# Altium PCB ScreenRGB.PcbDoc
Units mil, origin at the board's own origin, x right, y up, seen from the top; angles counter-clockwise.
Board outline 6000 x 4000 mil, 2 copper layers (Top Layer, Bottom Layer); 256 components, 258 nets, 1024 pads, 0 vias.
Unrouted connection lines stored in the file: 765.
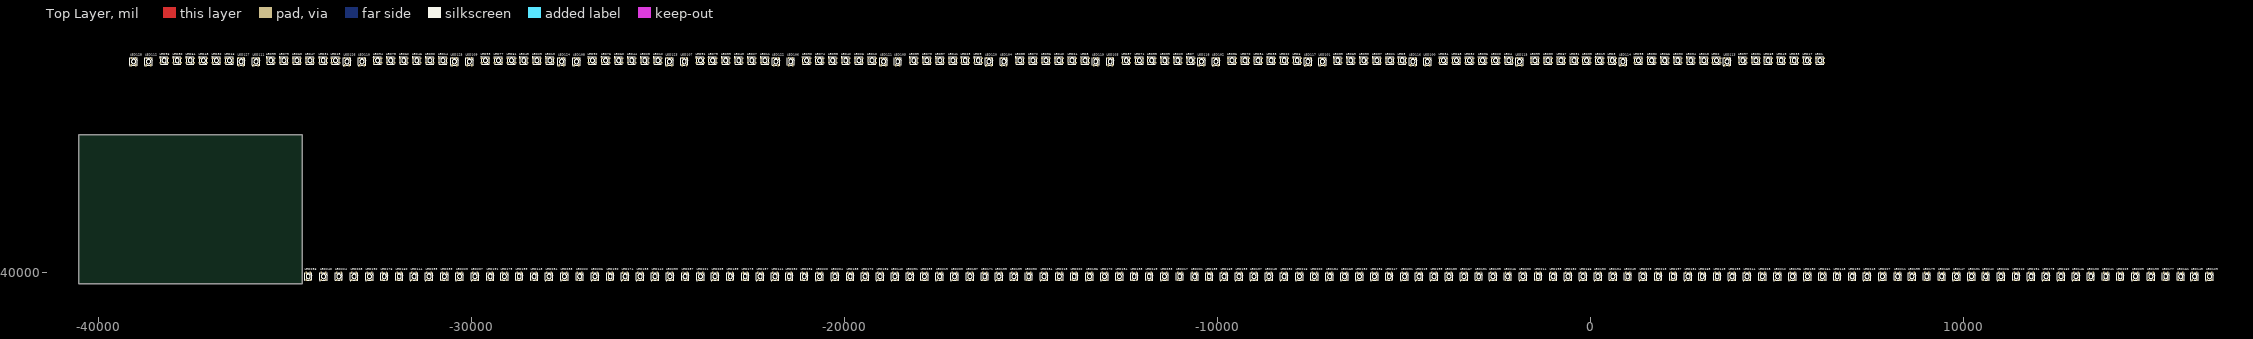
[diagram p0: Top Layer view]
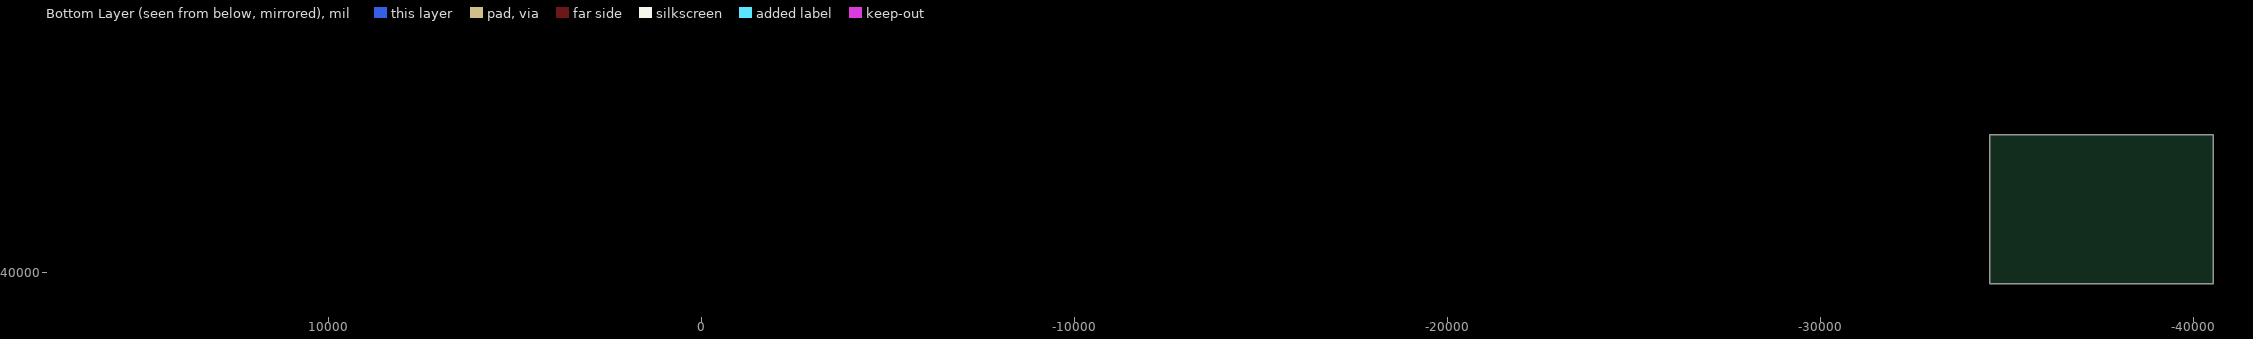
[diagram p1: Bottom Layer view, seen from below]

## Layer stack, top to bottom
Top Solder: solder mask 0.4, Solder Resist, Dk 3.5
Top Layer: signal copper 1.4
Dielectric 1: dielectric 12.6, FR-4, Dk 4.8
Bottom Layer: signal copper 1.4
Bottom Solder: solder mask 0.4, Solder Resist, Dk 3.5

## Board outline
-40540,-40310 -34540,-40310 -34540,-36310 -40540,-36310

## Design rules (kind name [scope] priority, off if disabled: settings)
Clearance [All] p1: gap=10
PolygonConnect [All] p1: connectstyle=Relief reliefconductorwidth=10 reliefentries=4 polygonreliefangle="90 Angle" airgapwidth=10
RoutingVias [All] p1: holewidth=28 width=50 viastyle="Through Hole" minholewidth=28 minwidth=50 maxholewidth=28 maxwidth=50
SolderMaskExpansion [All] p1: expansion=4
Width [All] p1: maxlimit=10 minlimit=10 preferedwidth=10
30 further rules are at their usual default settings.

## Components (designator, comment, footprint, x,y, rotation, side; value= is the part's Value field where it differs from the comment)
LED1 "RGB_WS2812C" LED_5050-SMD_4P-WS2812 6160.95,-34316.57 r0 top
LED2 "RGB_WS2812C" LED_5050-SMD_4P-WS2812 3385.95,-34316.57 r0 top
LED3 "RGB_WS2812C" LED_5050-SMD_4P-WS2812 590.95,-34316.57 r0 top
LED4 "RGB_WS2812C" LED_5050-SMD_4P-WS2812 -2184.05,-34316.57 r0 top
LED5 "RGB_WS2812C" LED_5050-SMD_4P-WS2812 -5044.05,-34316.57 r0 top
LED6 "RGB_WS2812C" LED_5050-SMD_4P-WS2812 -7859.05,-34316.57 r0 top
LED7 "RGB_WS2812C" LED_5050-SMD_4P-WS2812 -10714.05,-34316.57 r0 top
LED8 "RGB_WS2812C" LED_5050-SMD_4P-WS2812 -13549.05,-34316.57 r0 top
LED9 "RGB_WS2812C" LED_5050-SMD_4P-WS2812 -16414.05,-34316.57 r0 top
LED10 "RGB_WS2812C" LED_5050-SMD_4P-WS2812 -19264.05,-34316.57 r0 top
LED11 "RGB_WS2812C" LED_5050-SMD_4P-WS2812 -22139.05,-34316.57 r0 top
LED12 "RGB_WS2812C" LED_5050-SMD_4P-WS2812 -25009.05,-34316.57 r0 top
LED13 "RGB_WS2812C" LED_5050-SMD_4P-WS2812 -27904.05,-34316.57 r0 top
LED14 "RGB_WS2812C" LED_5050-SMD_4P-WS2812 -30774.05,-34316.57 r0 top
LED15 "RGB_WS2812C" LED_5050-SMD_4P-WS2812 -33654.05,-34316.57 r0 top
LED16 "RGB_WS2812C" LED_5050-SMD_4P-WS2812 -36499.05,-34316.57 r0 top
LED17 "RGB_WS2812C" LED_5050-SMD_4P-WS2812 5820.95,-34316.57 r0 top
LED18 "RGB_WS2812C" LED_5050-SMD_4P-WS2812 3045.95,-34316.57 r0 top
LED19 "RGB_WS2812C" LED_5050-SMD_4P-WS2812 250.95,-34316.57 r0 top
LED20 "RGB_WS2812C" LED_5050-SMD_4P-WS2812 -2539.05,-34316.57 r0 top
LED21 "RGB_WS2812C" LED_5050-SMD_4P-WS2812 -5374.05,-34316.57 r0 top
LED22 "RGB_WS2812C" LED_5050-SMD_4P-WS2812 -8209.05,-34316.57 r0 top
LED23 "RGB_WS2812C" LED_5050-SMD_4P-WS2812 -11064.05,-34316.57 r0 top
LED24 "RGB_WS2812C" LED_5050-SMD_4P-WS2812 -13899.05,-34316.57 r0 top
LED25 "RGB_WS2812C" LED_5050-SMD_4P-WS2812 -16764.05,-34316.57 r0 top
LED26 "RGB_WS2812C" LED_5050-SMD_4P-WS2812 -19614.05,-34316.57 r0 top
LED27 "RGB_WS2812C" LED_5050-SMD_4P-WS2812 -22489.05,-34316.57 r0 top
LED28 "RGB_WS2812C" LED_5050-SMD_4P-WS2812 -25359.05,-34316.57 r0 top
LED29 "RGB_WS2812C" LED_5050-SMD_4P-WS2812 -28254.05,-34316.57 r0 top
LED30 "RGB_WS2812C" LED_5050-SMD_4P-WS2812 -31124.05,-34316.57 r0 top
LED31 "RGB_WS2812C" LED_5050-SMD_4P-WS2812 -33984.05,-34316.57 r0 top
LED32 "RGB_WS2812C" LED_5050-SMD_4P-WS2812 -36849.05,-34316.57 r0 top
LED33 "RGB_WS2812C" LED_5050-SMD_4P-WS2812 5470.95,-34316.57 r0 top
LED34 "RGB_WS2812C" LED_5050-SMD_4P-WS2812 2695.95,-34316.57 r0 top
LED35 "RGB_WS2812C" LED_5050-SMD_4P-WS2812 -99.05,-34316.57 r0 top
LED36 "RGB_WS2812C" LED_5050-SMD_4P-WS2812 -2889.05,-34316.57 r0 top
LED37 "RGB_WS2812C" LED_5050-SMD_4P-WS2812 -5724.05,-34316.57 r0 top
LED38 "RGB_WS2812C" LED_5050-SMD_4P-WS2812 -8559.05,-34316.57 r0 top
LED39 "RGB_WS2812C" LED_5050-SMD_4P-WS2812 -11414.05,-34316.57 r0 top
LED40 "RGB_WS2812C" LED_5050-SMD_4P-WS2812 -14249.05,-34316.57 r0 top
LED41 "RGB_WS2812C" LED_5050-SMD_4P-WS2812 -17094.05,-34316.57 r0 top
LED42 "RGB_WS2812C" LED_5050-SMD_4P-WS2812 -19969.05,-34316.57 r0 top
LED43 "RGB_WS2812C" LED_5050-SMD_4P-WS2812 -22839.05,-34316.57 r0 top
LED44 "RGB_WS2812C" LED_5050-SMD_4P-WS2812 -25709.05,-34316.57 r0 top
LED45 "RGB_WS2812C" LED_5050-SMD_4P-WS2812 -28604.05,-34316.57 r0 top
LED46 "RGB_WS2812C" LED_5050-SMD_4P-WS2812 -31474.05,-34316.57 r0 top
LED47 "RGB_WS2812C" LED_5050-SMD_4P-WS2812 -34339.05,-34316.57 r0 top
LED48 "RGB_WS2812C" LED_5050-SMD_4P-WS2812 -37199.05,-34316.57 r0 top
LED49 "RGB_WS2812C" LED_5050-SMD_4P-WS2812 5120.95,-34316.57 r0 top
LED50 "RGB_WS2812C" LED_5050-SMD_4P-WS2812 2345.95,-34316.57 r0 top
LED51 "RGB_WS2812C" LED_5050-SMD_4P-WS2812 -434.05,-34316.57 r0 top
LED52 "RGB_WS2812C" LED_5050-SMD_4P-WS2812 -3239.05,-34316.57 r0 top
LED53 "RGB_WS2812C" LED_5050-SMD_4P-WS2812 -6074.05,-34316.57 r0 top
LED54 "RGB_WS2812C" LED_5050-SMD_4P-WS2812 -8909.05,-34316.57 r0 top
LED55 "RGB_WS2812C" LED_5050-SMD_4P-WS2812 -11764.05,-34316.57 r0 top
LED56 "RGB_WS2812C" LED_5050-SMD_4P-WS2812 -14599.05,-34316.57 r0 top
LED57 "RGB_WS2812C" LED_5050-SMD_4P-WS2812 -17444.05,-34316.57 r0 top
LED58 "RGB_WS2812C" LED_5050-SMD_4P-WS2812 -20319.05,-34316.57 r0 top
LED59 "RGB_WS2812C" LED_5050-SMD_4P-WS2812 -23189.05,-34316.57 r0 top
LED60 "RGB_WS2812C" LED_5050-SMD_4P-WS2812 -26059.05,-34316.57 r0 top
LED61 "RGB_WS2812C" LED_5050-SMD_4P-WS2812 -28934.05,-34316.57 r0 top
LED62 "RGB_WS2812C" LED_5050-SMD_4P-WS2812 -31824.05,-34316.57 r0 top
LED63 "RGB_WS2812C" LED_5050-SMD_4P-WS2812 -34689.05,-34316.57 r0 top
LED64 "RGB_WS2812C" LED_5050-SMD_4P-WS2812 -37549.05,-34316.57 r0 top
LED65 "RGB_WS2812C" LED_5050-SMD_4P-WS2812 4770.95,-34316.57 r0 top
LED66 "RGB_WS2812C" LED_5050-SMD_4P-WS2812 1995.95,-34316.57 r0 top
LED67 "RGB_WS2812C" LED_5050-SMD_4P-WS2812 -784.05,-34316.57 r0 top
LED68 "RGB_WS2812C" LED_5050-SMD_4P-WS2812 -3589.05,-34316.57 r0 top
LED69 "RGB_WS2812C" LED_5050-SMD_4P-WS2812 -6424.05,-34316.57 r0 top
LED70 "RGB_WS2812C" LED_5050-SMD_4P-WS2812 -9259.05,-34316.57 r0 top
LED71 "RGB_WS2812C" LED_5050-SMD_4P-WS2812 -12094.05,-34316.57 r0 top
LED72 "RGB_WS2812C" LED_5050-SMD_4P-WS2812 -14949.05,-34316.57 r0 top
LED73 "RGB_WS2812C" LED_5050-SMD_4P-WS2812 -17794.05,-34316.57 r0 top
LED74 "RGB_WS2812C" LED_5050-SMD_4P-WS2812 -20669.05,-34316.57 r0 top
LED75 "RGB_WS2812C" LED_5050-SMD_4P-WS2812 -23539.05,-34316.57 r0 top
LED76 "RGB_WS2812C" LED_5050-SMD_4P-WS2812 -26409.05,-34316.57 r0 top
LED77 "RGB_WS2812C" LED_5050-SMD_4P-WS2812 -29284.05,-34316.57 r0 top
LED78 "RGB_WS2812C" LED_5050-SMD_4P-WS2812 -32174.05,-34316.57 r0 top
LED79 "RGB_WS2812C" LED_5050-SMD_4P-WS2812 -35039.05,-34316.57 r0 top
LED80 "RGB_WS2812C" LED_5050-SMD_4P-WS2812 -37899.05,-34316.57 r0 top
LED81 "RGB_WS2812C" LED_5050-SMD_4P-WS2812 4440.95,-34316.57 r0 top
LED82 "RGB_WS2812C" LED_5050-SMD_4P-WS2812 1645.95,-34316.57 r0 top
LED83 "RGB_WS2812C" LED_5050-SMD_4P-WS2812 -1134.05,-34316.57 r0 top
LED84 "RGB_WS2812C" LED_5050-SMD_4P-WS2812 -3939.05,-34316.57 r0 top
LED85 "RGB_WS2812C" LED_5050-SMD_4P-WS2812 -6774.05,-34316.57 r0 top
LED86 "RGB_WS2812C" LED_5050-SMD_4P-WS2812 -9609.05,-34316.57 r0 top
LED87 "RGB_WS2812C" LED_5050-SMD_4P-WS2812 -12444.05,-34316.57 r0 top
LED88 "RGB_WS2812C" LED_5050-SMD_4P-WS2812 -15299.05,-34316.57 r0 top
LED89 "RGB_WS2812C" LED_5050-SMD_4P-WS2812 -18144.05,-34316.57 r0 top
LED90 "RGB_WS2812C" LED_5050-SMD_4P-WS2812 -21019.05,-34316.57 r0 top
LED91 "RGB_WS2812C" LED_5050-SMD_4P-WS2812 -23869.05,-34316.57 r0 top
LED92 "RGB_WS2812C" LED_5050-SMD_4P-WS2812 -26764.05,-34316.57 r0 top
LED93 "RGB_WS2812C" LED_5050-SMD_4P-WS2812 -29634.05,-34316.57 r0 top
LED94 "RGB_WS2812C" LED_5050-SMD_4P-WS2812 -32524.05,-34316.57 r0 top
LED95 "RGB_WS2812C" LED_5050-SMD_4P-WS2812 -35389.05,-34316.57 r0 top
LED96 "RGB_WS2812C" LED_5050-SMD_4P-WS2812 -38249.05,-34316.57 r0 top
LED97 "RGB_WS2812C" LED_5050-SMD_4P-WS2812 4090.95,-34316.57 r0 top
LED98 "RGB_WS2812C" LED_5050-SMD_4P-WS2812 1290.95,-34316.57 r0 top
LED99 "RGB_WS2812C" LED_5050-SMD_4P-WS2812 -1484.05,-34316.57 r0 top
LED100 "RGB_WS2812C" LED_5050-SMD_4P-WS2812 -4369.05,-34346.57 r90 top
LED101 "RGB_WS2812C" LED_5050-SMD_4P-WS2812 -7184.05,-34346.57 r90 top
LED102 "RGB_WS2812C" LED_5050-SMD_4P-WS2812 -10039.05,-34346.57 r90 top
LED103 "RGB_WS2812C" LED_5050-SMD_4P-WS2812 -12874.05,-34346.57 r90 top
LED104 "RGB_WS2812C" LED_5050-SMD_4P-WS2812 -15729.05,-34346.57 r90 top
LED105 "RGB_WS2812C" LED_5050-SMD_4P-WS2812 -18574.05,-34346.57 r90 top
LED106 "RGB_WS2812C" LED_5050-SMD_4P-WS2812 -21444.05,-34346.57 r90 top
LED107 "RGB_WS2812C" LED_5050-SMD_4P-WS2812 -24299.05,-34346.57 r90 top
LED108 "RGB_WS2812C" LED_5050-SMD_4P-WS2812 -27189.05,-34346.57 r90 top
LED109 "RGB_WS2812C" LED_5050-SMD_4P-WS2812 -30064.05,-34346.57 r90 top
LED110 "RGB_WS2812C" LED_5050-SMD_4P-WS2812 -32944.05,-34346.57 r90 top
LED111 "RGB_WS2812C" LED_5050-SMD_4P-WS2812 -35784.05,-34346.57 r90 top
LED112 "RGB_WS2812C" LED_5050-SMD_4P-WS2812 -38669.05,-34346.57 r90 top
LED113 "RGB_WS2812C" LED_5050-SMD_4P-WS2812 3670.95,-34346.57 r90 top
LED114 "RGB_WS2812C" LED_5050-SMD_4P-WS2812 875.95,-34346.57 r90 top
LED115 "RGB_WS2812C" LED_5050-SMD_4P-WS2812 -1899.05,-34346.57 r90 top
LED116 "RGB_WS2812C" LED_5050-SMD_4P-WS2812 -4759.05,-34346.57 r90 top
LED117 "RGB_WS2812C" LED_5050-SMD_4P-WS2812 -7574.05,-34346.57 r90 top
LED118 "RGB_WS2812C" LED_5050-SMD_4P-WS2812 -10429.05,-34346.57 r90 top
LED119 "RGB_WS2812C" LED_5050-SMD_4P-WS2812 -13264.05,-34346.57 r90 top
LED120 "RGB_WS2812C" LED_5050-SMD_4P-WS2812 -16129.05,-34346.57 r90 top
LED121 "RGB_WS2812C" LED_5050-SMD_4P-WS2812 -18954.05,-34346.57 r90 top
LED122 "RGB_WS2812C" LED_5050-SMD_4P-WS2812 -21844.05,-34346.57 r90 top
LED123 "RGB_WS2812C" LED_5050-SMD_4P-WS2812 -24699.05,-34346.57 r90 top
LED124 "RGB_WS2812C" LED_5050-SMD_4P-WS2812 -27589.05,-34346.57 r90 top
LED125 "RGB_WS2812C" LED_5050-SMD_4P-WS2812 -30464.05,-34346.57 r90 top
LED126 "RGB_WS2812C" LED_5050-SMD_4P-WS2812 -33344.05,-34346.57 r90 top
LED127 "RGB_WS2812C" LED_5050-SMD_4P-WS2812 -36184.05,-34346.57 r90 top
LED128 "RGB_WS2812C" LED_5050-SMD_4P-WS2812 -39069.05,-34346.57 r90 top
LED129 "RGB_WS2812C" LED_5050-SMD_4P-WS2812 16610,-40110 r90 top
LED130 "RGB_WS2812C" LED_5050-SMD_4P-WS2812 13425,-40110 r90 top
LED131 "RGB_WS2812C" LED_5050-SMD_4P-WS2812 10225,-40110 r90 top
LED132 "RGB_WS2812C" LED_5050-SMD_4P-WS2812 7025,-40110 r90 top
LED133 "RGB_WS2812C" LED_5050-SMD_4P-WS2812 3805,-40110 r90 top
LED134 "RGB_WS2812C" LED_5050-SMD_4P-WS2812 605,-40110 r90 top
LED135 "RGB_WS2812C" LED_5050-SMD_4P-WS2812 -2610,-40110 r90 top
LED136 "RGB_WS2812C" LED_5050-SMD_4P-WS2812 -5790,-40110 r90 top
LED137 "RGB_WS2812C" LED_5050-SMD_4P-WS2812 -9020,-40110 r90 top
LED138 "RGB_WS2812C" LED_5050-SMD_4P-WS2812 -12230,-40110 r90 top
LED139 "RGB_WS2812C" LED_5050-SMD_4P-WS2812 -15460,-40110 r90 top
LED140 "RGB_WS2812C" LED_5050-SMD_4P-WS2812 -18650,-40110 r90 top
LED141 "RGB_WS2812C" LED_5050-SMD_4P-WS2812 -21865,-40110 r90 top
LED142 "RGB_WS2812C" LED_5050-SMD_4P-WS2812 -25085,-40110 r90 top
LED143 "RGB_WS2812C" LED_5050-SMD_4P-WS2812 -28325,-40110 r90 top
LED144 "RGB_WS2812C" LED_5050-SMD_4P-WS2812 -31545,-40110 r90 top
LED145 "RGB_WS2812C" LED_5050-SMD_4P-WS2812 16210,-40110 r90 top
LED146 "RGB_WS2812C" LED_5050-SMD_4P-WS2812 13025,-40110 r90 top
LED147 "RGB_WS2812C" LED_5050-SMD_4P-WS2812 9825,-40110 r90 top
LED148 "RGB_WS2812C" LED_5050-SMD_4P-WS2812 6625,-40110 r90 top
LED149 "RGB_WS2812C" LED_5050-SMD_4P-WS2812 3405,-40110 r90 top
LED150 "RGB_WS2812C" LED_5050-SMD_4P-WS2812 205,-40110 r90 top
LED151 "RGB_WS2812C" LED_5050-SMD_4P-WS2812 -2990,-40110 r90 top
LED152 "RGB_WS2812C" LED_5050-SMD_4P-WS2812 -6190,-40110 r90 top
LED153 "RGB_WS2812C" LED_5050-SMD_4P-WS2812 -9420,-40110 r90 top
LED154 "RGB_WS2812C" LED_5050-SMD_4P-WS2812 -12630,-40110 r90 top
LED155 "RGB_WS2812C" LED_5050-SMD_4P-WS2812 -15860,-40110 r90 top
LED156 "RGB_WS2812C" LED_5050-SMD_4P-WS2812 -19050,-40110 r90 top
LED157 "RGB_WS2812C" LED_5050-SMD_4P-WS2812 -22265,-40110 r90 top
LED158 "RGB_WS2812C" LED_5050-SMD_4P-WS2812 -25485,-40110 r90 top
LED159 "RGB_WS2812C" LED_5050-SMD_4P-WS2812 -28725,-40110 r90 top
LED160 "RGB_WS2812C" LED_5050-SMD_4P-WS2812 -31945,-40110 r90 top
LED161 "RGB_WS2812C" LED_5050-SMD_4P-WS2812 15835,-40110 r90 top
LED162 "RGB_WS2812C" LED_5050-SMD_4P-WS2812 12625,-40110 r90 top
LED163 "RGB_WS2812C" LED_5050-SMD_4P-WS2812 9425,-40110 r90 top
LED164 "RGB_WS2812C" LED_5050-SMD_4P-WS2812 6225,-40110 r90 top
LED165 "RGB_WS2812C" LED_5050-SMD_4P-WS2812 3005,-40110 r90 top
LED166 "RGB_WS2812C" LED_5050-SMD_4P-WS2812 -195,-40110 r90 top
LED167 "RGB_WS2812C" LED_5050-SMD_4P-WS2812 -3390,-40110 r90 top
LED168 "RGB_WS2812C" LED_5050-SMD_4P-WS2812 -6590,-40110 r90 top
LED169 "RGB_WS2812C" LED_5050-SMD_4P-WS2812 -9820,-40110 r90 top
LED170 "RGB_WS2812C" LED_5050-SMD_4P-WS2812 -13030,-40110 r90 top
LED171 "RGB_WS2812C" LED_5050-SMD_4P-WS2812 -16240,-40110 r90 top
LED172 "RGB_WS2812C" LED_5050-SMD_4P-WS2812 -19450,-40110 r90 top
LED173 "RGB_WS2812C" LED_5050-SMD_4P-WS2812 -22665,-40110 r90 top
LED174 "RGB_WS2812C" LED_5050-SMD_4P-WS2812 -25885,-40110 r90 top
LED175 "RGB_WS2812C" LED_5050-SMD_4P-WS2812 -29125,-40110 r90 top
LED176 "RGB_WS2812C" LED_5050-SMD_4P-WS2812 -32345,-40110 r90 top
LED177 "RGB_WS2812C" LED_5050-SMD_4P-WS2812 15435,-40110 r90 top
LED178 "RGB_WS2812C" LED_5050-SMD_4P-WS2812 12225,-40110 r90 top
LED179 "RGB_WS2812C" LED_5050-SMD_4P-WS2812 9025,-40110 r90 top
LED180 "RGB_WS2812C" LED_5050-SMD_4P-WS2812 5825,-40110 r90 top
LED181 "RGB_WS2812C" LED_5050-SMD_4P-WS2812 2625,-40110 r90 top
LED182 "RGB_WS2812C" LED_5050-SMD_4P-WS2812 -595,-40110 r90 top
LED183 "RGB_WS2812C" LED_5050-SMD_4P-WS2812 -3790,-40110 r90 top
LED184 "RGB_WS2812C" LED_5050-SMD_4P-WS2812 -6990,-40110 r90 top
LED185 "RGB_WS2812C" LED_5050-SMD_4P-WS2812 -10220,-40110 r90 top
LED186 "RGB_WS2812C" LED_5050-SMD_4P-WS2812 -13430,-40110 r90 top
LED187 "RGB_WS2812C" LED_5050-SMD_4P-WS2812 -16640,-40110 r90 top
LED188 "RGB_WS2812C" LED_5050-SMD_4P-WS2812 -19850,-40110 r90 top
LED189 "RGB_WS2812C" LED_5050-SMD_4P-WS2812 -23065,-40110 r90 top
LED190 "RGB_WS2812C" LED_5050-SMD_4P-WS2812 -26285,-40110 r90 top
LED191 "RGB_WS2812C" LED_5050-SMD_4P-WS2812 -29505,-40110 r90 top
LED192 "RGB_WS2812C" LED_5050-SMD_4P-WS2812 -32745,-40110 r90 top
LED193 "RGB_WS2812C" LED_5050-SMD_4P-WS2812 15035,-40110 r90 top
LED194 "RGB_WS2812C" LED_5050-SMD_4P-WS2812 11825,-40110 r90 top
LED195 "RGB_WS2812C" LED_5050-SMD_4P-WS2812 8625,-40110 r90 top
LED196 "RGB_WS2812C" LED_5050-SMD_4P-WS2812 5425,-40110 r90 top
LED197 "RGB_WS2812C" LED_5050-SMD_4P-WS2812 2225,-40110 r90 top
LED198 "RGB_WS2812C" LED_5050-SMD_4P-WS2812 -995,-40110 r90 top
LED199 "RGB_WS2812C" LED_5050-SMD_4P-WS2812 -4190,-40110 r90 top
LED200 "RGB_WS2812C" LED_5050-SMD_4P-WS2812 -7400,-40110 r90 top
LED201 "RGB_WS2812C" LED_5050-SMD_4P-WS2812 -10610,-40110 r90 top
LED202 "RGB_WS2812C" LED_5050-SMD_4P-WS2812 -13840,-40110 r90 top
LED203 "RGB_WS2812C" LED_5050-SMD_4P-WS2812 -17050,-40110 r90 top
LED204 "RGB_WS2812C" LED_5050-SMD_4P-WS2812 -20260,-40110 r90 top
LED205 "RGB_WS2812C" LED_5050-SMD_4P-WS2812 -23475,-40110 r90 top
LED206 "RGB_WS2812C" LED_5050-SMD_4P-WS2812 -26695,-40110 r90 top
LED207 "RGB_WS2812C" LED_5050-SMD_4P-WS2812 -29915,-40110 r90 top
LED208 "RGB_WS2812C" LED_5050-SMD_4P-WS2812 -33155,-40110 r90 top
LED209 "RGB_WS2812C" LED_5050-SMD_4P-WS2812 14625,-40110 r90 top
LED210 "RGB_WS2812C" LED_5050-SMD_4P-WS2812 11425,-40110 r90 top
LED211 "RGB_WS2812C" LED_5050-SMD_4P-WS2812 8245,-40110 r90 top
LED212 "RGB_WS2812C" LED_5050-SMD_4P-WS2812 5025,-40110 r90 top
LED213 "RGB_WS2812C" LED_5050-SMD_4P-WS2812 1825,-40110 r90 top
LED214 "RGB_WS2812C" LED_5050-SMD_4P-WS2812 -1395,-40110 r90 top
LED215 "RGB_WS2812C" LED_5050-SMD_4P-WS2812 -4590,-40110 r90 top
LED216 "RGB_WS2812C" LED_5050-SMD_4P-WS2812 -7800,-40110 r90 top
LED217 "RGB_WS2812C" LED_5050-SMD_4P-WS2812 -11010,-40110 r90 top
LED218 "RGB_WS2812C" LED_5050-SMD_4P-WS2812 -14240,-40110 r90 top
LED219 "RGB_WS2812C" LED_5050-SMD_4P-WS2812 -17450,-40110 r90 top
LED220 "RGB_WS2812C" LED_5050-SMD_4P-WS2812 -20670,-40110 r90 top
LED221 "RGB_WS2812C" LED_5050-SMD_4P-WS2812 -23865,-40110 r90 top
LED222 "RGB_WS2812C" LED_5050-SMD_4P-WS2812 -27105,-40110 r90 top
LED223 "RGB_WS2812C" LED_5050-SMD_4P-WS2812 -30325,-40110 r90 top
LED224 "RGB_WS2812C" LED_5050-SMD_4P-WS2812 -33565,-40110 r90 top
LED225 "RGB_WS2812C" LED_5050-SMD_4P-WS2812 14215,-40110 r90 top
LED226 "RGB_WS2812C" LED_5050-SMD_4P-WS2812 11015,-40110 r90 top
LED227 "RGB_WS2812C" LED_5050-SMD_4P-WS2812 7835,-40110 r90 top
LED228 "RGB_WS2812C" LED_5050-SMD_4P-WS2812 4615,-40110 r90 top
LED229 "RGB_WS2812C" LED_5050-SMD_4P-WS2812 1415,-40110 r90 top
LED230 "RGB_WS2812C" LED_5050-SMD_4P-WS2812 -1805,-40110 r90 top
LED231 "RGB_WS2812C" LED_5050-SMD_4P-WS2812 -4980,-40110 r90 top
LED232 "RGB_WS2812C" LED_5050-SMD_4P-WS2812 -8210,-40110 r90 top
LED233 "RGB_WS2812C" LED_5050-SMD_4P-WS2812 -11420,-40110 r90 top
LED234 "RGB_WS2812C" LED_5050-SMD_4P-WS2812 -14650,-40110 r90 top
LED235 "RGB_WS2812C" LED_5050-SMD_4P-WS2812 -17860,-40110 r90 top
LED236 "RGB_WS2812C" LED_5050-SMD_4P-WS2812 -21080,-40110 r90 top
LED237 "RGB_WS2812C" LED_5050-SMD_4P-WS2812 -24275,-40110 r90 top
LED238 "RGB_WS2812C" LED_5050-SMD_4P-WS2812 -27515,-40110 r90 top
LED239 "RGB_WS2812C" LED_5050-SMD_4P-WS2812 -30735,-40110 r90 top
LED240 "RGB_WS2812C" LED_5050-SMD_4P-WS2812 -33975,-40110 r90 top
LED241 "RGB_WS2812C" LED_5050-SMD_4P-WS2812 13825,-40110 r90 top
LED242 "RGB_WS2812C" LED_5050-SMD_4P-WS2812 10605,-40110 r90 top
LED243 "RGB_WS2812C" LED_5050-SMD_4P-WS2812 7425,-40110 r90 top
LED244 "RGB_WS2812C" LED_5050-SMD_4P-WS2812 4205,-40110 r90 top
LED245 "RGB_WS2812C" LED_5050-SMD_4P-WS2812 1005,-40110 r90 top
LED246 "RGB_WS2812C" LED_5050-SMD_4P-WS2812 -2215,-40110 r90 top
LED247 "RGB_WS2812C" LED_5050-SMD_4P-WS2812 -5390,-40110 r90 top
LED248 "RGB_WS2812C" LED_5050-SMD_4P-WS2812 -8620,-40110 r90 top
LED249 "RGB_WS2812C" LED_5050-SMD_4P-WS2812 -11830,-40110 r90 top
LED250 "RGB_WS2812C" LED_5050-SMD_4P-WS2812 -15060,-40110 r90 top
LED251 "RGB_WS2812C" LED_5050-SMD_4P-WS2812 -18250,-40110 r90 top
LED252 "RGB_WS2812C" LED_5050-SMD_4P-WS2812 -21485,-40110 r90 top
LED253 "RGB_WS2812C" LED_5050-SMD_4P-WS2812 -24685,-40110 r90 top
LED254 "RGB_WS2812C" LED_5050-SMD_4P-WS2812 -27925,-40110 r90 top
LED255 "RGB_WS2812C" LED_5050-SMD_4P-WS2812 -31145,-40110 r90 top
LED256 "RGB_WS2812C" LED_5050-SMD_4P-WS2812 -34385,-40110 r90 top

## Footprints (in the part's own frame and the unit in brackets; to place one, negate y for a bottom-side part, rotate by r counter-clockwise, add the part's x,y. Pads: shape width x height; smd on the part's side, far side on the other; paste and mask are expansions set on the pad)
LED_5050-SMD_4P-WS2812 [mm]
  rect 1.5x1 smd: 1(-2.5,1.5) 2(-2.5,-1.5) 3(2.5,-1.5) 4(2.5,1.5)
  silkscreen extent -3,-2.5 2.5,2.5, body extent -2.65,-2.5 2.65,2.5, height 1.6

## Nets (pads, with @x,y where several pads share a name; then routed paths per layer and width w, separated by ;. In a path a pad name is that pad's centre, name@x,y a point inside that pad or via, vN(x,y) a via of type N, cw(c..) or ccw(c..) an arc to the next point about the centre after c; other vN are vias at no path point)
DIN: LED1.4
DOUT1: LED16.2 LED17.4
DOUT2: LED32.2 LED33.4
DOUT3: LED48.2 LED49.4
DOUT4: LED64.2 LED65.4
DOUT5: LED80.2 LED81.4
DOUT6: LED96.2 LED97.4
DOUT7: LED112.2 LED113.4
DOUT8: LED128.2 LED129.4
DOUT9: LED144.2 LED145.4
DOUT10: LED160.2 LED161.4
DOUT11: LED176.2 LED177.4
DOUT12: LED192.2 LED193.4
DOUT13: LED208.2 LED209.4
DOUT14: LED224.2 LED225.4
DOUT15: LED240.2 LED241.4
GND: LED1.3 LED2.3 LED3.3 LED4.3 LED5.3 LED6.3 LED7.3 LED8.3 LED9.3 LED10.3 LED11.3 LED12.3 LED13.3 LED14.3 LED15.3 LED16.3 LED17.3 LED18.3 LED19.3 LED20.3 LED21.3 LED22.3 LED23.3 LED24.3 LED25.3 LED26.3 LED27.3 LED28.3 LED29.3 LED30.3 LED31.3 LED32.3 LED33.3 LED34.3 LED35.3 LED36.3 LED37.3 LED38.3 LED39.3 LED40.3 LED41.3 LED42.3 LED43.3 LED44.3 LED45.3 LED46.3 LED47.3 LED48.3 LED49.3 LED50.3 LED51.3 LED52.3 LED53.3 LED54.3 LED55.3 LED56.3 LED57.3 LED58.3 LED59.3 LED60.3 LED61.3 LED62.3 LED63.3 LED64.3 LED65.3 LED66.3 LED67.3 LED68.3 LED69.3 LED70.3 LED71.3 LED72.3 LED73.3 LED74.3 LED75.3 LED76.3 LED77.3 LED78.3 LED79.3 LED80.3 LED81.3 LED82.3 LED83.3 LED84.3 LED85.3 LED86.3 LED87.3 LED88.3 LED89.3 LED90.3 LED91.3 LED92.3 LED93.3 LED94.3 LED95.3 LED96.3 LED97.3 LED98.3 LED99.3 LED100.3 LED101.3 LED102.3 LED103.3 LED104.3 LED105.3 LED106.3 LED107.3 LED108.3 LED109.3 LED110.3 LED111.3 LED112.3 LED113.3 LED114.3 LED115.3 LED116.3 LED117.3 LED118.3 LED119.3 LED120.3 LED121.3 LED122.3 LED123.3 LED124.3 LED125.3 LED126.3 LED127.3 LED128.3 LED129.3 LED130.3 LED131.3 LED132.3 LED133.3 LED134.3 LED135.3 LED136.3 LED137.3 LED138.3 LED139.3 LED140.3 LED141.3 LED142.3 LED143.3 LED144.3 LED145.3 LED146.3 LED147.3 LED148.3 LED149.3 LED150.3 LED151.3 LED152.3 LED153.3 LED154.3 LED155.3 LED156.3 LED157.3 LED158.3 LED159.3 LED160.3 LED161.3 LED162.3 LED163.3 LED164.3 LED165.3 LED166.3 LED167.3 LED168.3 LED169.3 LED170.3 LED171.3 LED172.3 LED173.3 LED174.3 LED175.3 LED176.3 LED177.3 LED178.3 LED179.3 LED180.3 LED181.3 LED182.3 LED183.3 LED184.3 LED185.3 LED186.3 LED187.3 LED188.3 LED189.3 LED190.3 LED191.3 LED192.3 LED193.3 LED194.3 LED195.3 LED196.3 LED197.3 LED198.3 LED199.3 LED200.3 LED201.3 LED202.3 LED203.3 LED204.3 LED205.3 LED206.3 LED207.3 LED208.3 LED209.3 LED210.3 LED211.3 LED212.3 LED213.3 LED214.3 LED215.3 LED216.3 LED217.3 LED218.3 LED219.3 LED220.3 LED221.3 LED222.3 LED223.3 LED224.3 LED225.3 LED226.3 LED227.3 LED228.3 LED229.3 LED230.3 LED231.3 LED232.3 LED233.3 LED234.3 LED235.3 LED236.3 LED237.3 LED238.3 LED239.3 LED240.3 LED241.3 LED242.3 LED243.3 LED244.3 LED245.3 LED246.3 LED247.3 LED248.3 LED249.3 LED250.3 LED251.3 LED252.3 LED253.3 LED254.3 LED255.3 LED256.3
NetLED1_2: LED1.2 LED2.4
NetLED2_2: LED2.2 LED3.4
NetLED3_2: LED3.2 LED4.4
NetLED4_2: LED4.2 LED5.4
NetLED5_2: LED5.2 LED6.4
NetLED6_2: LED6.2 LED7.4
NetLED7_2: LED7.2 LED8.4
NetLED8_2: LED8.2 LED9.4
NetLED9_2: LED9.2 LED10.4
NetLED10_2: LED10.2 LED11.4
NetLED11_2: LED11.2 LED12.4
NetLED12_2: LED12.2 LED13.4
NetLED13_2: LED13.2 LED14.4
NetLED14_2: LED14.2 LED15.4
NetLED15_2: LED15.2 LED16.4
NetLED17_2: LED17.2 LED18.4
NetLED18_2: LED18.2 LED19.4
NetLED19_2: LED19.2 LED20.4
NetLED20_2: LED20.2 LED21.4
NetLED21_2: LED21.2 LED22.4
NetLED22_2: LED22.2 LED23.4
NetLED23_2: LED23.2 LED24.4
NetLED24_2: LED24.2 LED25.4
NetLED25_2: LED25.2 LED26.4
NetLED26_2: LED26.2 LED27.4
NetLED27_2: LED27.2 LED28.4
NetLED28_2: LED28.2 LED29.4
NetLED29_2: LED29.2 LED30.4
NetLED30_2: LED30.2 LED31.4
NetLED31_2: LED31.2 LED32.4
NetLED33_2: LED33.2 LED34.4
NetLED34_2: LED34.2 LED35.4
NetLED35_2: LED35.2 LED36.4
NetLED36_2: LED36.2 LED37.4
NetLED37_2: LED37.2 LED38.4
NetLED38_2: LED38.2 LED39.4
NetLED39_2: LED39.2 LED40.4
NetLED40_2: LED40.2 LED41.4
NetLED41_2: LED41.2 LED42.4
NetLED42_2: LED42.2 LED43.4
NetLED43_2: LED43.2 LED44.4
NetLED44_2: LED44.2 LED45.4
NetLED45_2: LED45.2 LED46.4
NetLED46_2: LED46.2 LED47.4
NetLED47_2: LED47.2 LED48.4
NetLED49_2: LED49.2 LED50.4
NetLED50_2: LED50.2 LED51.4
NetLED51_2: LED51.2 LED52.4
NetLED52_2: LED52.2 LED53.4
NetLED53_2: LED53.2 LED54.4
NetLED54_2: LED54.2 LED55.4
NetLED55_2: LED55.2 LED56.4
NetLED56_2: LED56.2 LED57.4
NetLED57_2: LED57.2 LED58.4
NetLED58_2: LED58.2 LED59.4
NetLED59_2: LED59.2 LED60.4
NetLED60_2: LED60.2 LED61.4
NetLED61_2: LED61.2 LED62.4
NetLED62_2: LED62.2 LED63.4
NetLED63_2: LED63.2 LED64.4
NetLED65_2: LED65.2 LED66.4
NetLED66_2: LED66.2 LED67.4
NetLED67_2: LED67.2 LED68.4
NetLED68_2: LED68.2 LED69.4
NetLED69_2: LED69.2 LED70.4
NetLED70_2: LED70.2 LED71.4
NetLED71_2: LED71.2 LED72.4
NetLED72_2: LED72.2 LED73.4
NetLED73_2: LED73.2 LED74.4
NetLED74_2: LED74.2 LED75.4
NetLED75_2: LED75.2 LED76.4
NetLED76_2: LED76.2 LED77.4
NetLED77_2: LED77.2 LED78.4
NetLED78_2: LED78.2 LED79.4
NetLED79_2: LED79.2 LED80.4
NetLED81_2: LED81.2 LED82.4
NetLED82_2: LED82.2 LED83.4
NetLED83_2: LED83.2 LED84.4
NetLED84_2: LED84.2 LED85.4
NetLED85_2: LED85.2 LED86.4
NetLED86_2: LED86.2 LED87.4
NetLED87_2: LED87.2 LED88.4
NetLED88_2: LED88.2 LED89.4
NetLED89_2: LED89.2 LED90.4
NetLED90_2: LED90.2 LED91.4
NetLED91_2: LED91.2 LED92.4
NetLED92_2: LED92.2 LED93.4
NetLED93_2: LED93.2 LED94.4
NetLED94_2: LED94.2 LED95.4
NetLED95_2: LED95.2 LED96.4
NetLED97_2: LED97.2 LED98.4
NetLED98_2: LED98.2 LED99.4
NetLED99_2: LED99.2 LED100.4
NetLED100_2: LED100.2 LED101.4
NetLED101_2: LED101.2 LED102.4
NetLED102_2: LED102.2 LED103.4
NetLED103_2: LED103.2 LED104.4
NetLED104_2: LED104.2 LED105.4
NetLED105_2: LED105.2 LED106.4
NetLED106_2: LED106.2 LED107.4
NetLED107_2: LED107.2 LED108.4
NetLED108_2: LED108.2 LED109.4
NetLED109_2: LED109.2 LED110.4
NetLED110_2: LED110.2 LED111.4
NetLED111_2: LED111.2 LED112.4
NetLED113_2: LED113.2 LED114.4
NetLED114_2: LED114.2 LED115.4
NetLED115_2: LED115.2 LED116.4
NetLED116_2: LED116.2 LED117.4
NetLED117_2: LED117.2 LED118.4
NetLED118_2: LED118.2 LED119.4
NetLED119_2: LED119.2 LED120.4
NetLED120_2: LED120.2 LED121.4
NetLED121_2: LED121.2 LED122.4
NetLED122_2: LED122.2 LED123.4
NetLED123_2: LED123.2 LED124.4
NetLED124_2: LED124.2 LED125.4
NetLED125_2: LED125.2 LED126.4
NetLED126_2: LED126.2 LED127.4
NetLED127_2: LED127.2 LED128.4
NetLED129_2: LED129.2 LED130.4
NetLED130_2: LED130.2 LED131.4
NetLED131_2: LED131.2 LED132.4
NetLED132_2: LED132.2 LED133.4
NetLED133_2: LED133.2 LED134.4
NetLED134_2: LED134.2 LED135.4
NetLED135_2: LED135.2 LED136.4
NetLED136_2: LED136.2 LED137.4
NetLED137_2: LED137.2 LED138.4
NetLED138_2: LED138.2 LED139.4
NetLED139_2: LED139.2 LED140.4
NetLED140_2: LED140.2 LED141.4
NetLED141_2: LED141.2 LED142.4
NetLED142_2: LED142.2 LED143.4
NetLED143_2: LED143.2 LED144.4
NetLED145_2: LED145.2 LED146.4
NetLED146_2: LED146.2 LED147.4
NetLED147_2: LED147.2 LED148.4
NetLED148_2: LED148.2 LED149.4
NetLED149_2: LED149.2 LED150.4
NetLED150_2: LED150.2 LED151.4
NetLED151_2: LED151.2 LED152.4
NetLED152_2: LED152.2 LED153.4
NetLED153_2: LED153.2 LED154.4
NetLED154_2: LED154.2 LED155.4
NetLED155_2: LED155.2 LED156.4
NetLED156_2: LED156.2 LED157.4
NetLED157_2: LED157.2 LED158.4
NetLED158_2: LED158.2 LED159.4
NetLED159_2: LED159.2 LED160.4
NetLED161_2: LED161.2 LED162.4
NetLED162_2: LED162.2 LED163.4
NetLED163_2: LED163.2 LED164.4
NetLED164_2: LED164.2 LED165.4
NetLED165_2: LED165.2 LED166.4
NetLED166_2: LED166.2 LED167.4
NetLED167_2: LED167.2 LED168.4
NetLED168_2: LED168.2 LED169.4
NetLED169_2: LED169.2 LED170.4
NetLED170_2: LED170.2 LED171.4
NetLED171_2: LED171.2 LED172.4
NetLED172_2: LED172.2 LED173.4
NetLED173_2: LED173.2 LED174.4
NetLED174_2: LED174.2 LED175.4
NetLED175_2: LED175.2 LED176.4
NetLED177_2: LED177.2 LED178.4
NetLED178_2: LED178.2 LED179.4
NetLED179_2: LED179.2 LED180.4
NetLED180_2: LED180.2 LED181.4
NetLED181_2: LED181.2 LED182.4
NetLED182_2: LED182.2 LED183.4
NetLED183_2: LED183.2 LED184.4
NetLED184_2: LED184.2 LED185.4
NetLED185_2: LED185.2 LED186.4
NetLED186_2: LED186.2 LED187.4
NetLED187_2: LED187.2 LED188.4
NetLED188_2: LED188.2 LED189.4
NetLED189_2: LED189.2 LED190.4
NetLED190_2: LED190.2 LED191.4
NetLED191_2: LED191.2 LED192.4
NetLED193_2: LED193.2 LED194.4
NetLED194_2: LED194.2 LED195.4
NetLED195_2: LED195.2 LED196.4
NetLED196_2: LED196.2 LED197.4
NetLED197_2: LED197.2 LED198.4
NetLED198_2: LED198.2 LED199.4
NetLED199_2: LED199.2 LED200.4
NetLED200_2: LED200.2 LED201.4
NetLED201_2: LED201.2 LED202.4
NetLED202_2: LED202.2 LED203.4
NetLED203_2: LED203.2 LED204.4
NetLED204_2: LED204.2 LED205.4
NetLED205_2: LED205.2 LED206.4
NetLED206_2: LED206.2 LED207.4
NetLED207_2: LED207.2 LED208.4
NetLED209_2: LED209.2 LED210.4
NetLED210_2: LED210.2 LED211.4
NetLED211_2: LED211.2 LED212.4
NetLED212_2: LED212.2 LED213.4
NetLED213_2: LED213.2 LED214.4
NetLED214_2: LED214.2 LED215.4
NetLED215_2: LED215.2 LED216.4
NetLED216_2: LED216.2 LED217.4
NetLED217_2: LED217.2 LED218.4
NetLED218_2: LED218.2 LED219.4
NetLED219_2: LED219.2 LED220.4
NetLED220_2: LED220.2 LED221.4
NetLED221_2: LED221.2 LED222.4
NetLED222_2: LED222.2 LED223.4
NetLED223_2: LED223.2 LED224.4
NetLED225_2: LED225.2 LED226.4
NetLED226_2: LED226.2 LED227.4
NetLED227_2: LED227.2 LED228.4
NetLED228_2: LED228.2 LED229.4
NetLED229_2: LED229.2 LED230.4
NetLED230_2: LED230.2 LED231.4
NetLED231_2: LED231.2 LED232.4
NetLED232_2: LED232.2 LED233.4
NetLED233_2: LED233.2 LED234.4
NetLED234_2: LED234.2 LED235.4
NetLED235_2: LED235.2 LED236.4
NetLED236_2: LED236.2 LED237.4
NetLED237_2: LED237.2 LED238.4
NetLED238_2: LED238.2 LED239.4
NetLED239_2: LED239.2 LED240.4
NetLED241_2: LED241.2 LED242.4
NetLED242_2: LED242.2 LED243.4
NetLED243_2: LED243.2 LED244.4
NetLED244_2: LED244.2 LED245.4
NetLED245_2: LED245.2 LED246.4
NetLED246_2: LED246.2 LED247.4
NetLED247_2: LED247.2 LED248.4
NetLED248_2: LED248.2 LED249.4
NetLED249_2: LED249.2 LED250.4
NetLED250_2: LED250.2 LED251.4
NetLED251_2: LED251.2 LED252.4
NetLED252_2: LED252.2 LED253.4
NetLED253_2: LED253.2 LED254.4
NetLED254_2: LED254.2 LED255.4
NetLED255_2: LED255.2 LED256.4
VCC: LED1.1 LED2.1 LED3.1 LED4.1 LED5.1 LED6.1 LED7.1 LED8.1 LED9.1 LED10.1 LED11.1 LED12.1 LED13.1 LED14.1 LED15.1 LED16.1 LED17.1 LED18.1 LED19.1 LED20.1 LED21.1 LED22.1 LED23.1 LED24.1 LED25.1 LED26.1 LED27.1 LED28.1 LED29.1 LED30.1 LED31.1 LED32.1 LED33.1 LED34.1 LED35.1 LED36.1 LED37.1 LED38.1 LED39.1 LED40.1 LED41.1 LED42.1 LED43.1 LED44.1 LED45.1 LED46.1 LED47.1 LED48.1 LED49.1 LED50.1 LED51.1 LED52.1 LED53.1 LED54.1 LED55.1 LED56.1 LED57.1 LED58.1 LED59.1 LED60.1 LED61.1 LED62.1 LED63.1 LED64.1 LED65.1 LED66.1 LED67.1 LED68.1 LED69.1 LED70.1 LED71.1 LED72.1 LED73.1 LED74.1 LED75.1 LED76.1 LED77.1 LED78.1 LED79.1 LED80.1 LED81.1 LED82.1 LED83.1 LED84.1 LED85.1 LED86.1 LED87.1 LED88.1 LED89.1 LED90.1 LED91.1 LED92.1 LED93.1 LED94.1 LED95.1 LED96.1 LED97.1 LED98.1 LED99.1 LED100.1 LED101.1 LED102.1 LED103.1 LED104.1 LED105.1 LED106.1 LED107.1 LED108.1 LED109.1 LED110.1 LED111.1 LED112.1 LED113.1 LED114.1 LED115.1 LED116.1 LED117.1 LED118.1 LED119.1 LED120.1 LED121.1 LED122.1 LED123.1 LED124.1 LED125.1 LED126.1 LED127.1 LED128.1 LED129.1 LED130.1 LED131.1 LED132.1 LED133.1 LED134.1 LED135.1 LED136.1 LED137.1 LED138.1 LED139.1 LED140.1 LED141.1 LED142.1 LED143.1 LED144.1 LED145.1 LED146.1 LED147.1 LED148.1 LED149.1 LED150.1 LED151.1 LED152.1 LED153.1 LED154.1 LED155.1 LED156.1 LED157.1 LED158.1 LED159.1 LED160.1 LED161.1 LED162.1 LED163.1 LED164.1 LED165.1 LED166.1 LED167.1 LED168.1 LED169.1 LED170.1 LED171.1 LED172.1 LED173.1 LED174.1 LED175.1 LED176.1 LED177.1 LED178.1 LED179.1 LED180.1 LED181.1 LED182.1 LED183.1 LED184.1 LED185.1 LED186.1 LED187.1 LED188.1 LED189.1 LED190.1 LED191.1 LED192.1 LED193.1 LED194.1 LED195.1 LED196.1 LED197.1 LED198.1 LED199.1 LED200.1 LED201.1 LED202.1 LED203.1 LED204.1 LED205.1 LED206.1 LED207.1 LED208.1 LED209.1 LED210.1 LED211.1 LED212.1 LED213.1 LED214.1 LED215.1 LED216.1 LED217.1 LED218.1 LED219.1 LED220.1 LED221.1 LED222.1 LED223.1 LED224.1 LED225.1 LED226.1 LED227.1 LED228.1 LED229.1 LED230.1 LED231.1 LED232.1 LED233.1 LED234.1 LED235.1 LED236.1 LED237.1 LED238.1 LED239.1 LED240.1 LED241.1 LED242.1 LED243.1 LED244.1 LED245.1 LED246.1 LED247.1 LED248.1 LED249.1 LED250.1 LED251.1 LED252.1 LED253.1 LED254.1 LED255.1 LED256.1
pads on no net: LED256.2